# Altium PCB 遥控2.PcbDoc
Units mil, origin at the board's own origin, x right, y up, seen from the top; angles counter-clockwise.
Board outline 1574.8 x 787.4 mil, 2 copper layers (Top Layer, Bottom Layer); 32 components, 15 nets, 85 pads, 7 vias.
Unrouted connection lines stored in the file: 22.
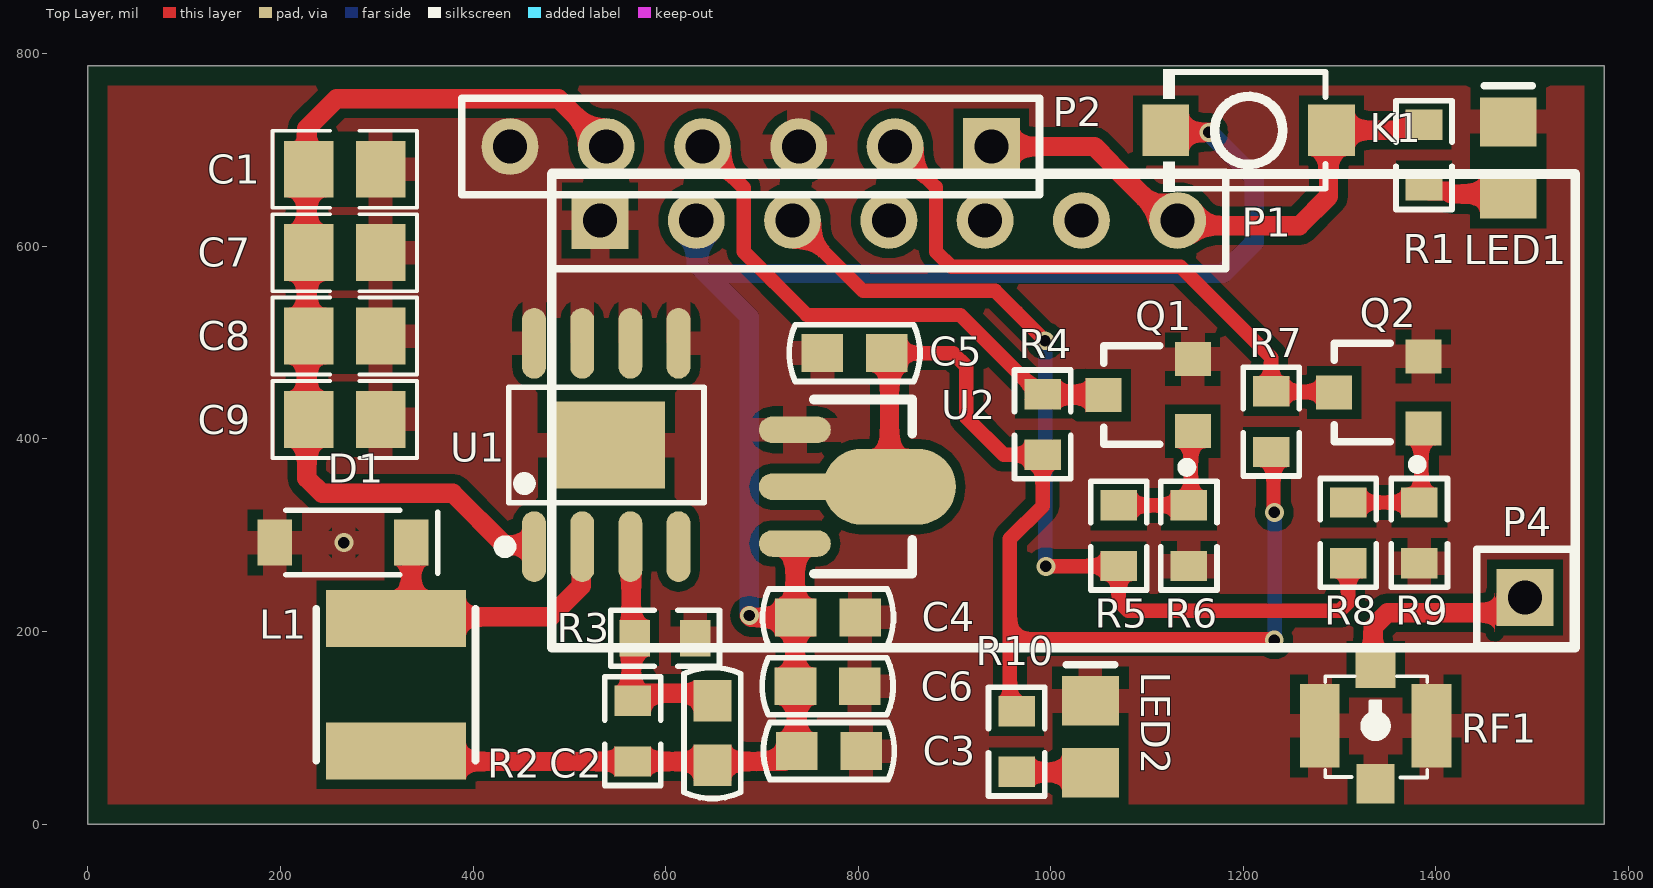
[diagram p0: Top Layer view]
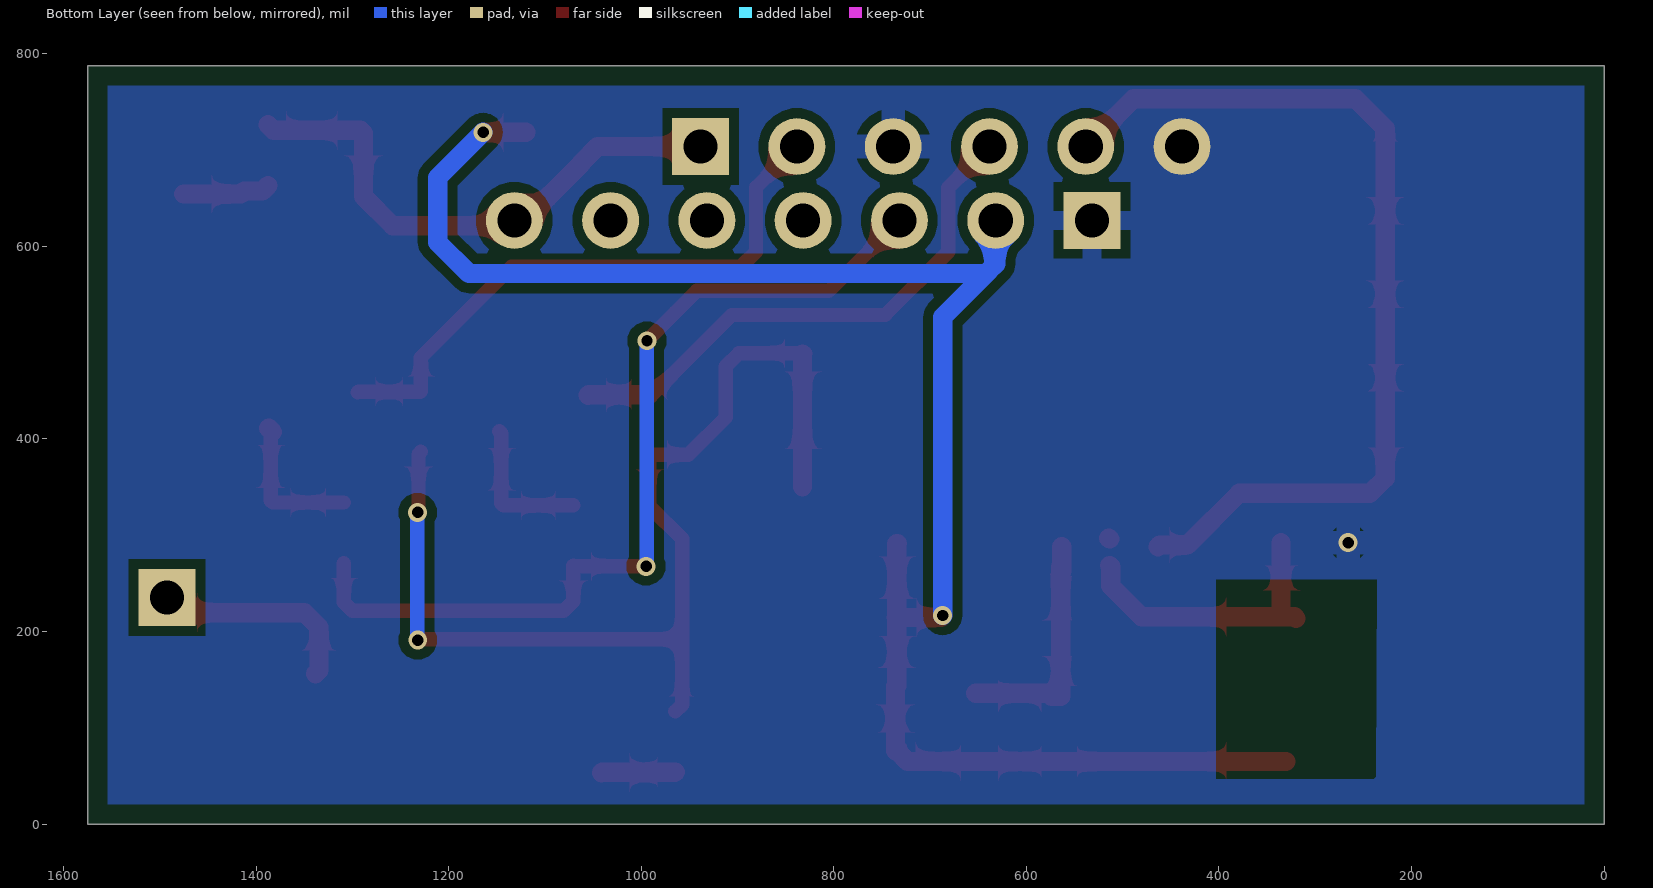
[diagram p1: Bottom Layer view, seen from below]
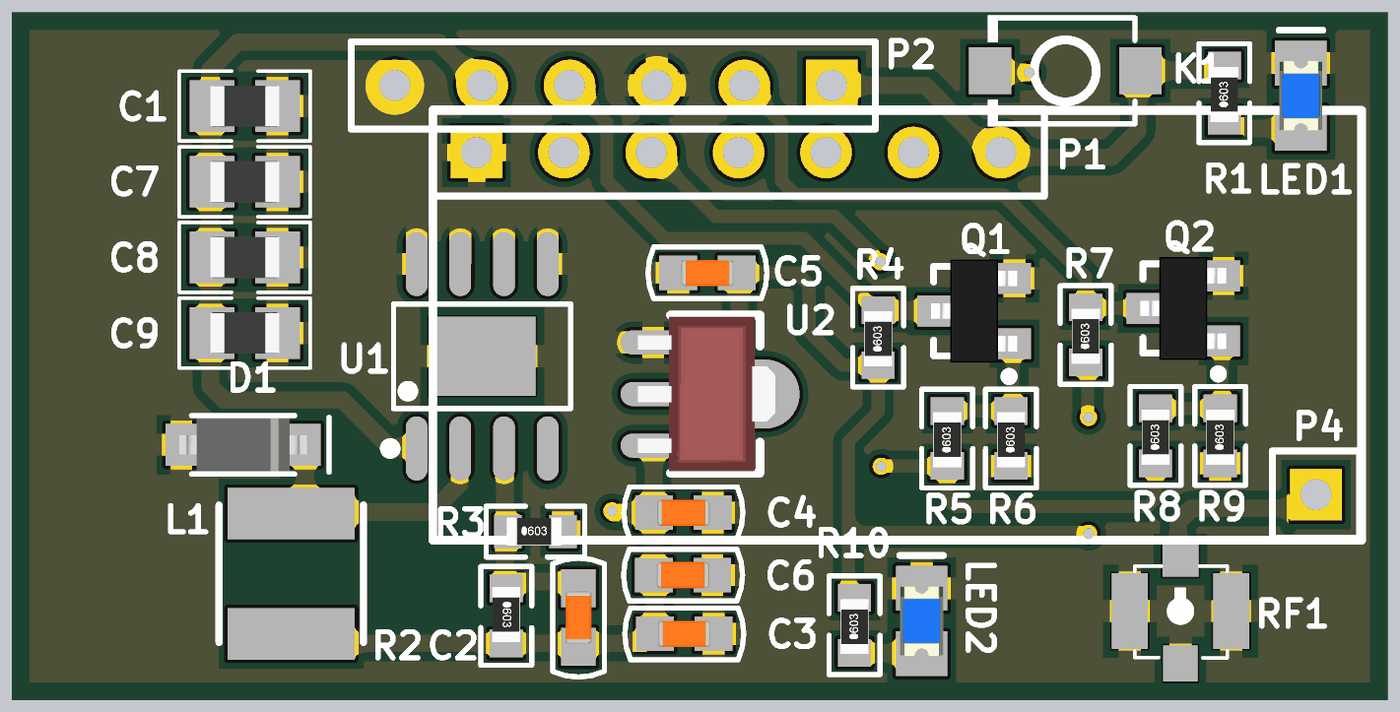
[diagram p2: 3D render of the assembled board from above, using the file's embedded part models]

## Layer stack, top to bottom
Top Solder: solder mask 0.4, Solder Resist, Dk 3.5
Top Layer: signal copper 1.4
Dielectric 1: dielectric 12.6, FR-4, Dk 4.8
Bottom Layer: signal copper 1.4
Bottom Solder: solder mask 0.4, Solder Resist, Dk 3.5

## Board outline
0,0 0,787.4 1574.8,787.4 1574.8,0

## Design rules (kind name [scope] priority, off if disabled: settings)
BoardOutlineClearance [All] p1: gap=20 ignorepadtopadclearanceinfootprint=FALSE
Clearance [All] p1: gap=10 ignorepadtopadclearanceinfootprint=FALSE except(0: Arc-Hole Track-Hole SMDPad-Hole THPad-Hole Via-Hole Fill-Hole Poly-Hole Region-Hole Text-Hole)
PolygonConnect [All] p1: connectstyle=Relief reliefconductorwidth=25 reliefentries=4 polygonreliefangle="90 Angle" airgapwidth=10
RoutingVias [All] p1: holewidth=11.81 width=19.68 viastyle="Through Hole" minholewidth=11.81 minwidth=19.68 maxholewidth=11.81 maxwidth=19.68
SolderMaskExpansion [All] p1: expansion=4 istentingtop=FALSE
Width [All] p1: maxlimit=30 minlimit=10 preferedwidth=20
30 further rules are at their usual default settings.

## Components (designator, comment, footprint, x,y, rotation, side; value= is the part's Value field where it differs from the comment)
C1 "10uF" 0805 266.73,680.12 r180 top
C2 "33nF" CAP-0603 648.62,94.49 r270 top
C3 "1uF" CAP-0603 769.69,75.79 r180 top
C4 "10uF" CAP-0603 768.7,214.57 r180 top
C5 "10uF" CAP-0603 796.26,489.17 r0 top
C6 "100nF" CAP-0603 768.32,143.08 r180 top
C7 "10uF" 0805 266.73,593.5 r180 top
C8 "100nF" 0805 266.73,506.89 r180 top
C9 "10nF" 0805 266.73,420.28 r180 top
D1 "S210" SOD-123 264.76,292.32 r0 top
K1 "SW-PB" SW-SMD_L3.9-W3.0-P4.45 1205.71,720.47 r180 top
L1 "47uH" IND-SMD_L4.0-W4.0_FNR4012S 319.88,144.68 r90 top
LED1 "LED" LED_0805 1475.39,691.93 r90 top
LED2 "LED" LED_0805 1041.34,90.55 r90 top
P1 "Header 7" HDR1X7 531.89,626.97 r0 top
P2 "Header 6" HDR1X6 938.39,703.74 r180 top
P4 "Plug" HEADER_1 1492.72,235.24 r180 top
Q1 "SS8050" SOT-23 1101.39,445.44 r90 top
Q2 "SS8050" SOT-23 1340.8,448.39 r90 top
R1 "1K" "0603 - duplicate1" 1387.8,694.88 r90 top
R2 "10K" "0603 - duplicate1" 565.94,96.46 r270 top
R3 "3.3K" "0603 - duplicate1" 599.41,192.91 r0 top
R4 "4.7K" "0603 - duplicate1" 991.65,415.04 r90 top value=10K
R5 "1K" "0603 - duplicate1" 1070.65,299.54 r90 top value=10K
R6 "10K" "0603 - duplicate1" 1143.65,299.54 r90 top
R7 "4.7K" "0603 - duplicate1" 1229.06,417.99 r90 top value=10K
R8 "1K" "0603 - duplicate1" 1309.06,302.49 r90 top value=10K
R9 "10K" "0603 - duplicate1" 1383.06,302.49 r90 top
R10 "1K" "0603 - duplicate1" 964.57,85.63 r90 top
RF1 "6GHz" CONN-SMD_GT-RF1125A-01G 1337.6,101.38 r180 top
U1 "XL7005A" SOIC-8_L4.9-W3.9-P1.27-LS6.0-BL-EP3.1-1 538.39,393.7 r0 top
U2 "AMS1117-3.3" SOT89 783.46,350.39 r180 top

## Footprints (in the part's own frame and the unit in brackets; to place one, negate y for a bottom-side part, rotate by r counter-clockwise, add the part's x,y. Pads: shape width x height; smd on the part's side, far side on the other; paste and mask are expansions set on the pad)
"0603 - duplicate1" [mm] "贴片带丝印"
  rect 0.8x0.965 smd: 1(-0.8,0) 2(0.8,0)
  silkscreen extent -1.43,-0.74 1.44,0.74, body extent -0.84,-0.41 0.76,0.41, height 0.45
0805 [mm] "贴片带丝印"
  rect 1.3x1.5 smd: 1(-0.95,0) 2(0.95,0)
  silkscreen extent -1.91,-1.02 1.91,1.02, body extent -1,-0.6 1,0.6, height 0.85
CAP-0603 [mm] "贴片电容"
  rect 1.1x1 smd: 1(-0.85,0) 2(0.85,0)
  silkscreen extent -1.73,-0.75 1.73,0.75, body extent -0.76,-0.38 0.76,0.38, height 0.78
CONN-SMD_GT-RF1125A-01G [mm]
  rect 1.05x2.2 smd paste+0 mask+0.05: 1(-1.475,-0.012) 3(1.475,-0.012)
  rect 1x1.05 smd paste+0 mask+0.05: 2(0,1.513)
  rect 1.05x1 smd paste+0 mask+0.05: 4(0,-1.513)
  silkscreen extent -1.36,-1.32 1.33,1.35
HDR1X6 [mm] "Connector; Header; 6 Position"
  rect 1.5x1.5 hole 0.9: 1(0,0)
  round 1.5 hole 0.9: 2(2.54,0) 3(5.08,0) 4(7.62,0) 5(10.16,0) 6(12.7,0)
  silkscreen extent -1.27,-1.27 13.97,1.27
HDR1X7 [mm] "Connector; Header; 7 Position"
  rect 1.5x1.5 hole 0.9: 1(0,0)
  round 1.5 hole 0.9: 2(2.54,0) 3(5.08,0) 4(7.62,0) 5(10.16,0) 6(12.7,0) 7(15.24,0)
  silkscreen extent -1.27,-1.27 16.51,1.27
HEADER_1 [mm] "2.54排针-3x1"
  rect 1.5x1.5 hole 0.9: 1(0,0)
  silkscreen extent -1.27,-1.27 1.27,1.27
IND-SMD_L4.0-W4.0_FNR4012S [mm]
  rect 1.5x3.7 smd: 1(-1.75,0) 2(1.75,0)
  silkscreen extent -2,-2.1 2,2.1
LED_0805 [mm] "贴片二极管"
  rect 1.3x1.5 smd: 1(-0.95,0) 2(0.95,0)
  silkscreen extent 1.91,-0.63 1.91,0.64, body extent -1.01,-0.62 1.01,0.62, height 1.1
SOD-123 [mm]
  rect 0.91x1.22 smd: 1(1.8,0) 2(-1.8,0)
  silkscreen extent -1.5,-0.85 2.5,0.85, body extent -1.85,-0.77 1.85,0.78, height 1.18
SOIC-8_L4.9-W3.9-P1.27-LS6.0-BL-EP3.1-1 [mm]
  oval 0.63x1.865 smd: 1(-1.905,-2.683) 2(-0.635,-2.683) 3(0.635,-2.683) 4(1.905,-2.683) 5(1.905,2.682) 6(0.635,2.682) 7(-0.635,2.682) 8(-1.905,2.682)
  rect 3.1x2.3 smd paste+0 mask+0.05: 9(0,0)
  silkscreen extent -2.82,-2.83 2.58,1.52
SOT89 [mm] "SOT89封装"
  oval 1.9x0.7 smd: 1(1.25,-1.5) 3(1.25,1.5)
  oval 3.5x2 smd: 2(-1.25,0)
  oval 2.1x0.7 smd: 2(1.151,0)
  silkscreen extent -1.85,-2.3 0.75,2.3, body extent -2.3,-2.25 1.7,2.25, height 1.5
SOT-23 [mm]
  rect 0.9x0.95 smd: 1(-0.95,-1.175) 2(0.95,-1.175) 3(0,1.175)
  silkscreen extent -2.03,-1.14 1.3,1.18, body extent -1.5,-1.25 1.5,1.25, height 1.15
SW-SMD_L3.9-W3.0-P4.45 [mm]
  rect 1.23x1.36 smd: 1(-2.185,0) 2(2.185,0)
  silkscreen extent -2.03,-1.62 2.25,1.62

## Part data
C1 C2 C3 C4 C5 C6 C7 C8 C9: library part Cap, "无极性电容", LatestRevisionDate=17-Jul-2002, LatestRevisionNote="Re-released for DXP Platform.", PackageReference=RAD-0.3, Published=8-Jun-2000, Publisher="Altium Limited"
D1: library part B340A, LCSC Assembly=Yes, Manufacturer=MDD, image=//image.lceda.cn/szlcsc/C64982.jpg, Manufacturer Part=B340A, SMT Type=Extend, spicePre=D, spiceSymbolName=B340A, Supplier=LCSC, Supplier Part=C64982
K1: "微动开关", LatestRevisionDate=17-Jul-2002, LatestRevisionNote="Re-released for DXP Platform.", PackageReference=SPST-2, Published=24-Mar-1999, Publisher="Altium Limited", Suppliter Part=C961737
L1: library part 68uH, Manufacturer=SXN, Manufacturer Part=SMDRI127-680MT, nameAlias=Inductance, spicePre=L, spiceSymbolName=SMDRI127-680MT, Supplier=LCSC, Supplier Part=C9907
LED1 LED2: "发光二极管", LatestRevisionDate=08-Jul-2005, LatestRevisionNote="Mech Layer 1 removed.", PackageReference=LED-0, Published=8-Jun-2000, Publisher="Altium Limited"
P1: "Header, 7-Pin", LatestRevisionDate=17-Jul-2002, LatestRevisionNote="Re-released for DXP Platform.", Publisher="Altium Limited"
P2: "Header, 6-Pin", LatestRevisionDate=17-Jul-2002, LatestRevisionNote="Re-released for DXP Platform.", Publisher="Altium Limited"
P4: "安装孔", LatestRevisionDate=17-Jul-2002, LatestRevisionNote="Re-released for DXP Platform.", Publisher="Altium Limited"
Q1 Q2: "NPN贴片三极管", PackageDocument=Sep-1998, Code_JEDEC=TO-92A, ComponentLink1Description="Manufacturer Link", ComponentLink1URL=http://www.fairchildsemi.com/, ComponentLink2Description=Datasheet, ComponentLink2URL=http://www.fairchildsemi.com/ds/2N%2F2N3904.pdf, DatasheetDocument=1997, LatestRevisionDate=15-Jan-2003, LatestRevisionNote="PCB Footprint 'BCY-W3/D4.7' replaced", PackageReference=TO-92A, Published=8-Jun-2000, Publisher="Altium Limited"
R1 R4 R5 R6 R7 R8 R9 R10: library part Res, "贴片电阻", LatestRevisionDate=17-Jul-2002, LatestRevisionNote="Re-released for DXP Platform.", PackageReference=AXIAL-0.4, Published=8-Jun-2000, Publisher="Altium Limited"
R2: library part 1K, LCSC Assembly=Yes, Manufacturer=UniOhm, Manufacturer Part=0603WAF1001T5E, nameAlias="Resistance (Ohms)", SMT Type=Basic, spicePre=R, spiceSymbolName=0603WAF1001T5E, Supplier=LCSC, Supplier Part=C21190
R3: library part 3K, LCSC Assembly=Yes, Manufacturer=UniOhm, Manufacturer Part=0603WAF3001T5E, nameAlias="Resistance (Ohms)", SMT Type=Basic, spicePre=R, spiceSymbolName=0603WAF3001T5E, Supplier=LCSC, Supplier Part=C4211
RF1: library part GT-RF1125A-01G, JLCPCB Part Class="Extended Part", LCSC Part Name="内针 IPEX 立贴", Manufacturer=G-Switch(品赞), Operating Temperature Range=-40℃~+90℃, Add into BOM=yes, Connector Type=板端, Convert to PCB=yes, Datasheet=https://atta.szlcsc.com/upload/public/pdf/source/20240806/E29158DC2BBCFBE0FBB4FF318E1913A6.pdf, Device=GT-RF1125A-01G, Impedance=20mΩ, Interface=内针, Interface Diameter=2mm, Interface Length/Height=1.25mm, Manufacturer Part=GT-RF1125A-01G, Number of Ports=1, RF Series=IPEX, Style=立贴, Supplier=LCSC, Supplier Footprint=SMD, Supplier Part=C5299419, Symbol=GT-RF1125A-01G
U1: Frequency - Switching=150kHz, JLCPCB Part Class="Extended Part", LCSC Part Name="0.4A 150kHz 80V 降压型DC-DC转换器", Manufacturer=XLSEMI(芯龙), Operating Temperature=-40℃~+125℃@(TJ), Output Current=400mA, Output Voltage=1.25V~20V, Quiescent Current=2.5mA, Voltage - Supply=5V~80V, Add into BOM=yes, Convert to PCB=yes, Datasheet=https://atta.szlcsc.com/upload/public/pdf/source/20150821/1457707346919.pdf, Device=XL7005A, Function=降压型, Manufacturer Part=XL7005A, Number of Outputs=1, Output Type=可调, Supplier=LCSC, Supplier Footprint=SOIC-8-EP, Supplier Part=C50848, Switch tube (built-in/external)=内置, Symbol=XL7005A, Synchronous Rectifier=否, Topology=降压式
U2: library part AMS1117, "3.3V稳压芯片"

## Via types
v1: diameter 19.68, hole 11.81, Top Layer to Bottom Layer, 7 vias

## Nets (pads, with @x,y where several pads share a name; then routed paths per layer and width w, separated by ;. In a path a pad name is that pad's centre, name@x,y a point inside that pad or via, vN(x,y) a via of type N, cw(c..) or ccw(c..) an arc to the next point about the centre after c; other vN are vias at no path point)
+3.3V: C5.2 R4.1 R7.1 R10.2 U2.2 | length 1128.7
  Top Layer w15: C5.2 898.62,489.17 912.4,475.39 912.4,422.24 951.1,383.54 R4.1 991.65,330.24 957.68,296.26 957.68,191.93 ; R10.2 957.68,124.02 957.68,191.93 ; R7.1 1231.48,384.08 1231.48,324.63 v1(1232.37,323.73) v1@1233.27,322.83 ; v1@1231.3,191.93 1231.21,191.84 1228.07,191.84 1227.99,191.93 957.68,191.93
  Top Layer w20: U2.2@832.66,350.4 C5.2@832.66,488.2
  Bottom Layer w15: v1(1232.28,190.94) 1232.78,191.44 v1@1232.78,322.34
+5V: C2.2 C3.2 C4.2 C6.2 K1.2 L1.1 P1.2 R2.2 U2.3 | length 1906.4
  Top Layer w20: L1.1@330.71,64.96 R2.2 723.43,64.96 733.76,75.3 C3.2@733.76,78.25 ; v1(687.01,216.54) 688.98,214.57 C4.2@734.56,214.57 ; U2.3 734.56,291.05 C4.2@734.56,214.57 ; C6.2 734.56,143.38 C4.2@734.56,214.57 ; C4.2 C4.2@734.56,214.57 ; C3.2@736,76 C6.2@736,143.08 ; K1.2@1119.69,718.5 v1(1164.37,718.5)
  Bottom Layer w20: P1.2 631.89,581.69 633.8,579.78 ; P1.2@633.8,616.2 633.8,579.78 ; v1(687.01,216.54) 687.01,526.57 641.73,571.85 ; v1(1164.37,718.5) 1211.61,671.26 1211.61,604.33 1179.13,571.85 641.73,571.85 ; 633.8,579.78 641.73,571.85
A1: P2.4 Q1.3 R4.2 | length 562.7
  Top Layer w15: P2.4 681.1,661.02 681.1,594.49 746.85,528.74 906.2,528.74 988.41,446.54 R4.2
  Top Layer w20: R4.2 992.2,445.99 1054.59,445.99 Q1.3
A2: P2.2 Q2.3 R7.2 | length 621.5
  Top Layer w15: P2.2 880.91,661.22 880.91,594.49 896.65,578.74 1134.84,578.74 1229.06,484.52 R7.2 1229.61,448.94 1294,448.94 Q2.3
ANT: P4.1 RF1.4 | length 218.3
  Top Layer w20: RF1.4@1338.57,156 1334.82,159.75 1334.82,204.31 1350,219.49 P4.1@1497,219.49
D0_5V: P1.3 R5.1 R8.1 | length 947.8
  Top Layer w15: P1.3 805.12,553.74 942.32,553.74 964.57,531.5 v1(994.09,501.97) ; v1(995.08,267.72) 995.24,267.88 1070.49,267.88 R5.1 1070.65,231.51 1080.71,221.46 1300.2,221.46 1309.06,230.32 R8.1
  Bottom Layer w15: v1(994.09,501.97) 994.59,501.48 994.59,268.21 v1(995.08,267.72)
GND: C1.1 C3.1 C4.1 C5.1 C6.1 C7.1 C8.1 C9.1 D1.2 LED1.2 LED2.2 P1.1 P2.3 P2.6 Q1.2 Q2.2 R3.2 R6.1 R9.1 RF1.1 RF1.2 RF1.3 U1.5 U1.6 U1.7 U1.8 U1.9 U2.1
  other v1: 265.75,292.32
NetC2_1: C2.1 R2.1 R3.1 U1.3 | length 253
  Top Layer w20: U1.3 U1.3@563.39,268.41 ; C2.1@652.56,135.83 577.07,135.83 573.62,132.38 564.3,132.38 U1.3@564.3,261.56 ; U1.3@563.39,268.41 563.39,262.48 U1.3@564.3,261.56 ; U1.3@563.39,268.41 564.3,267.49 U1.3@564.3,261.56
NetD1_1: D1.1 L1.2 U1.2 | length 294.3
  Top Layer w20: L1.2 321.52,215.22 480.48,215.22 512.47,247.21 512.47,267.49 U1.2@513.39,268.41 ; L1.2@335.63,227.36 D1.1 ; U1.2@513.45,296.03 U1.2@514.37,296.95
NetLED1_1: LED1.1 R1.1 | length 91.3
  Top Layer w20: R1.1 1393.54,657.64 1412.76,657.64 1415.87,654.53 LED1.1
NetLED2_1: LED2.1 R10.1 | length 77.2
  Top Layer w20: R10.1 965.06,53.64 1040.85,53.64 LED2.1
NetQ1_1: Q1.1 R5.2 R6.2 | length 151.7
  Top Layer w15: R5.2 R6.2 1145.65,333.03 1145.65,406.04 Q1.1
NetQ2_1: Q2.1 R8.2 R9.2 | length 154.2
  Top Layer w15: R8.2 R9.2 1385.06,335.98 1385.06,405.25 Q2.1@1383.19,407.12
  Top Layer w20: Q2.1@1383.19,407.12 Q2.1
V+: C1.2 C7.2 C8.2 C9.2 P2.5 U1.1 | length 973.1
  Top Layer w20: U1.1 461.74,289.74 432.7,289.74 378.94,343.5 243.01,343.5 227.36,359.16 227.36,722.44 258.19,753.27 488.86,753.27 P2.5
VT: K1.1 P1.7 P2.1 R1.2 | length 564.2
  Top Layer w20: P2.1 1045.47,703.74 1062.2,687.01 1062.2,686.09 1121.32,626.97 P1.7 ; P1.7@1131.35,621.5 1258.31,621.5 1288.61,651.79 1288.61,717.51 1291.73,720.63 1382.05,720.63 R1.2
pads on no net: P1.4 P1.5 P1.6 U1.4

## Polygon pours and split planes (outlines as drawn)
GND on Top Layer "GND_L01_P000" (solid, remove dead copper, pour order 0): 0,790.12 0,0 1574.8,0 1574.8,787.4
GND on Bottom Layer "GND_L02_P001" (solid, remove dead copper, pour order 1): 0,787.4 0,0 1574.8,0 1574.8,695.87 1574.8,787.4

## Other copper
Top Layer:
  pour cut-out: 237.05,253.39 237.05,47.24 402.72,47.24 402.72,253.39
Bottom Layer:
  pour cut-out: 236.22,253.94 402.56,253.94 402.56,47.24 239.17,47.24 237.2,49.21

## Silkscreen, mask and mechanical layers (free items; w line width, h text height)
Top Overlay:
  lines w10: 481.89,183.07 1544.88,183.07 1544.88,675.2 481.89,675.2 481.89,183.07
Mechanical 1:
  the board outline again, w20